# EAGLE board clock_v0.2 (EAGLE 9.5.0)
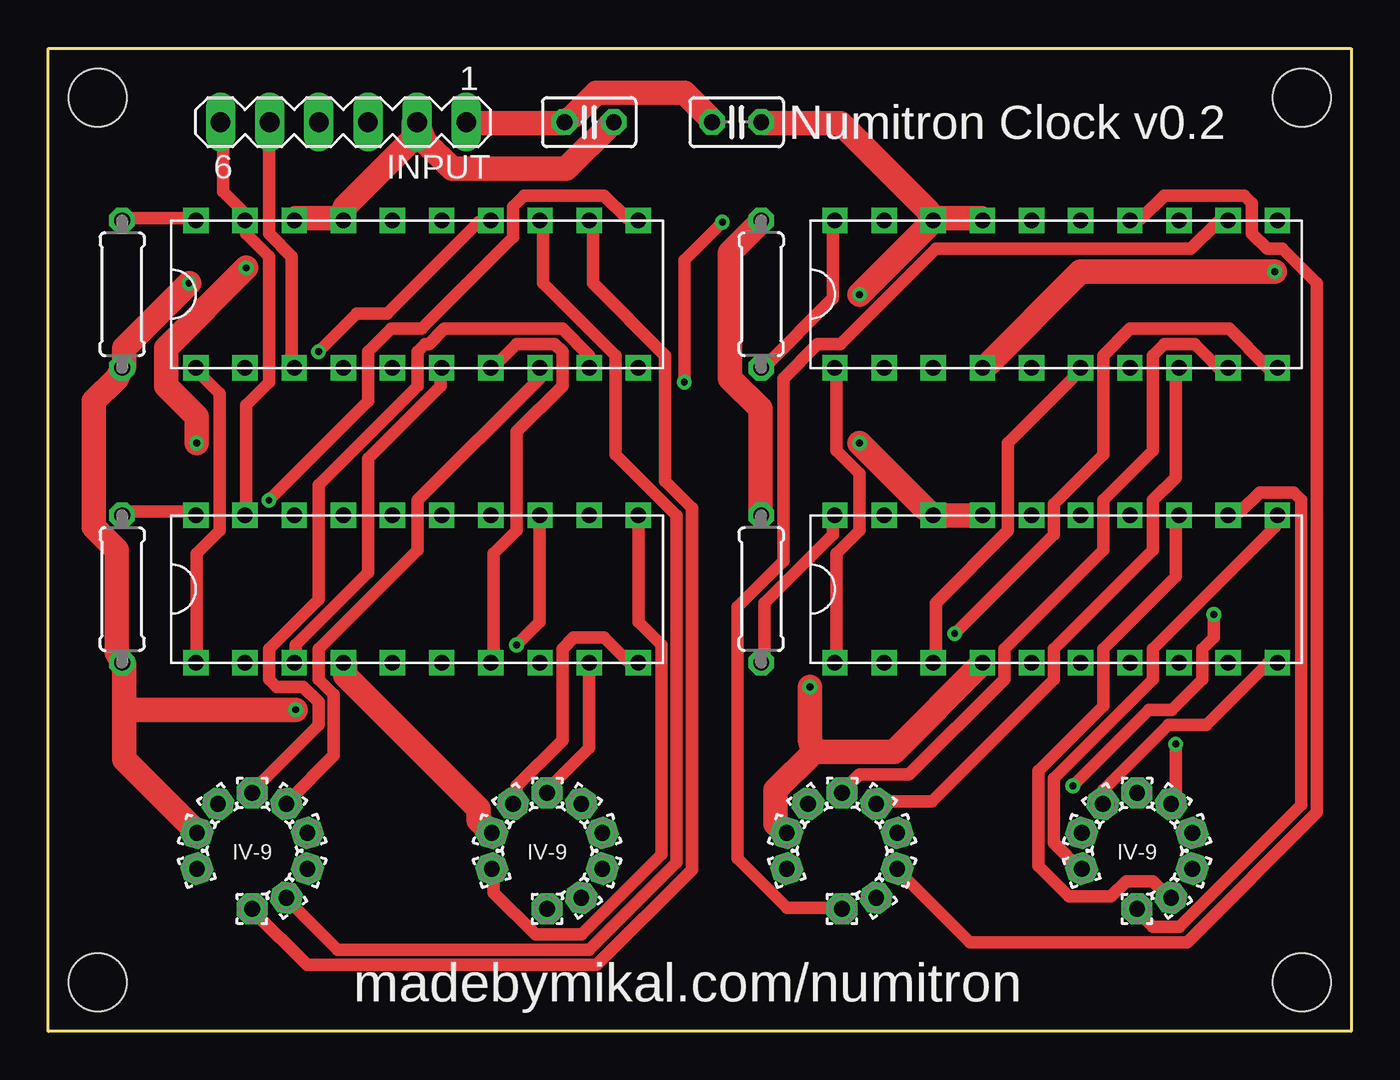
[diagram p0: board, top side]
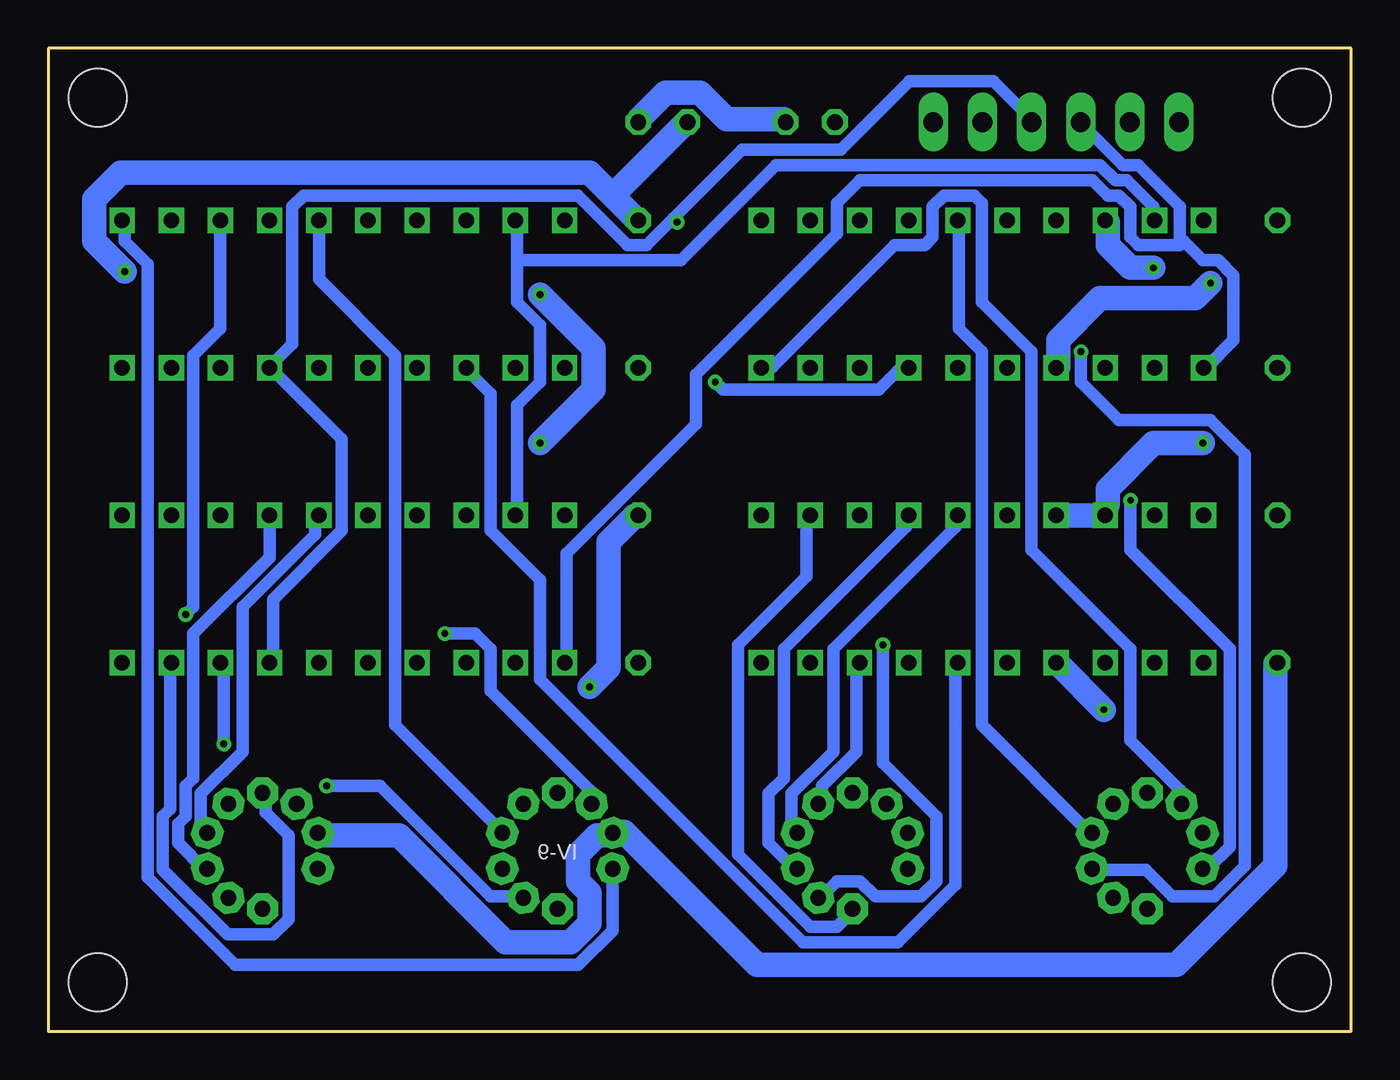
[diagram p1: board, bottom side, seen from below]

Size 67.31 x 50.8 mm. Coordinates in mm from the lower left corner, seen from the top.
Outline: 0,0 0,50.8 67.31,50.8 67.31,0 0,0
Copper layers (1*16): Top 0.035mm / dielectric 1.5mm / Bottom 0.035mm
Design rules "default": minimum track width 6mil, minimum drill 0.35mm, track to track 6mil, track to pad 6mil, pad to pad 6mil, via to via 6mil, smd to smd 6mil, copper to edge 40mil, drill to drill 6mil, minimum pad ring 10mil, minimum via ring 8mil, stop-mask expansion 4mil, vias tented up to drill 0mil, thermal gap 10mil
Net classes: 0 default: width 0.635 mm; 1 vcc: width 1.27 mm; 2 ground: width 1.27 mm
Holes 3 mm at 2.54,2.54 2.54,48.26 64.77,2.54 64.77,48.26

## Footprints (pad centres in the part's own frame; a part is rotated, then mirrored left to right if it is on the bottom)
RCL_C025-025X050 = drill 0.813 octagon: 1 -1.27,0; 2 1.27,0
1,6/0,8 = drill 0.813 pad 1.6 octagon: 1 0,0
CON-LSTB_MA06-1 = drill 1.016 long: 1 -6.35,0; 2 -3.81,0; 3 -1.27,0; 4 1.27,0; 5 3.81,0; 6 6.35,0
RCL_0207/7 = drill 0.813 octagon: 1 -3.81,0; 2 3.81,0
TPIC6B595N_PDIP-20 = drill 0.8 square: P$1 -3.81,1.27; P$2 -3.81,3.81; P$3 -3.81,6.35; P$4 -3.81,8.89; P$5 -3.81,-1.27; P$6 -3.81,-3.81; P$7 -3.81,-6.35; P$8 -3.81,-8.89; P$9 -3.81,-11.43; P$10 -3.81,11.43; P$11 3.81,1.27; P$12 3.81,3.81; P$13 3.81,6.35; P$14 3.81,8.89; P$15 3.81,11.43; P$16 3.81,-1.27; P$17 3.81,-3.81; P$18 3.81,-6.35; P$19 3.81,-8.89; P$20 3.81,-11.43

## Placement (x,y rotation side)
C1  0.1uF  [RCL_C025-025X050]  35.56,46.99 0 top
C2  47uF  [RCL_C025-025X050]  27.94,46.99 0 top
DEC1  [1,6/0,8]  12.29,6.91 306 top
DEC2  [1,6/0,8]  27.53,6.91 306 top
DEC4  [1,6/0,8]  42.77,6.91 306 top
DEC6  [1,6/0,8]  58.01,6.91 306 top
INPUT  [CON-LSTB_MA06-1]  15.24,46.99 180 top
R1  10K  [RCL_0207/7]  3.81,38.1 270 top
R3  10K  [RCL_0207/7]  3.81,22.86 270 top
R5  10K  [RCL_0207/7]  36.83,38.1 90 top
R7  10K  [RCL_0207/7]  36.83,22.86 90 top
SEGA1  [1,6/0,8]  12.29,11.76 144 top
SEGA2  [1,6/0,8]  27.53,11.76 144 top
SEGA4  [1,6/0,8]  42.77,11.76 144 top
SEGA6  [1,6/0,8]  58.01,11.76 144 top
SEGB1  [1,6/0,8]  13.38,8.41 342 top
SEGB2  [1,6/0,8]  28.62,8.41 342 top
SEGB4  [1,6/0,8]  43.86,8.41 342 top
SEGB6  [1,6/0,8]  59.1,8.41 342 top
SEGC1  [1,6/0,8]  13.38,10.26 18 top
SEGC2  [1,6/0,8]  28.62,10.26 18 top
SEGC4  [1,6/0,8]  43.86,10.26 18 top
SEGC6  [1,6/0,8]  59.1,10.26 18 top
SEGD1  [1,6/0,8]  7.67,10.26 162 top
SEGD2  [1,6/0,8]  22.91,10.26 162 top
SEGD4  [1,6/0,8]  38.15,10.26 162 top
SEGD6  [1,6/0,8]  53.39,10.26 162 top
SEGE1  [1,6/0,8]  7.67,8.41 198 top
SEGE2  [1,6/0,8]  22.91,8.41 198 top
SEGE4  [1,6/0,8]  38.15,8.41 198 top
SEGE6  [1,6/0,8]  53.39,8.41 198 top
SEGF1  [1,6/0,8]  10.53,12.33 90 top
SEGF2  [1,6/0,8]  25.77,12.33 90 top
SEGF4  [1,6/0,8]  41.01,12.33 90 top
SEGF6  [1,6/0,8]  56.25,12.33 90 top
SEGG1  [1,6/0,8]  8.76,11.76 126 top
SEGG2  [1,6/0,8]  24,11.76 126 top
SEGG4  [1,6/0,8]  39.24,11.76 126 top
SEGG6  [1,6/0,8]  54.48,11.76 126 top
U$1  [TPIC6B595N_PDIP-20]  19.05,38.1 90 top
U$3  [TPIC6B595N_PDIP-20]  19.05,22.86 90 top
U$5  [TPIC6B595N_PDIP-20]  52.07,38.1 90 top
U$7  [TPIC6B595N_PDIP-20]  52.07,22.86 90 top
VCC1  [1,6/0,8]  10.53,6.33 270 top
VCC2  [1,6/0,8]  25.77,6.33 270 top
VCC4  [1,6/0,8]  41.01,6.33 270 top
VCC6  [1,6/0,8]  56.25,6.33 270 top

## Library data of the parts
C1 C2 = v0.4; SPICEPREFIX: C
DEC1 DEC2 DEC4 DEC6 SEGA1 SEGA2 SEGA4 SEGA6 SEGB1 SEGB2 SEGB4 SEGB6 SEGC1 SEGC2 SEGC4 SEGC6 SEGD1 SEGD2 SEGD4 SEGD6 SEGE1 SEGE2 SEGE4 SEGE6 SEGF1 SEGF2 SEGF4 SEGF6 SEGG1 SEGG2 SEGG4 SEGG6 VCC1 VCC2 VCC4 VCC6 = wirepad
INPUT = v0.4; OC_FARNELL: unknown; OC_NEWARK: unknown
R1 R3 R5 R7 = v0.4; SPICEPREFIX: R
U$1 U$3 U$5 U$7 = v0.4

## Nets
G: INPUT.6 U$1.P$14 U$3.P$14 U$5.P$14 U$7.P$14
GND [ground]: C1.2 C2.2 INPUT.2 U$1.P$12 U$1.P$13 U$3.P$12 U$3.P$13 U$5.P$12 U$5.P$13 U$7.P$12 U$7.P$13
N$1: R1.1 U$1.P$15
N$2: U$1.P$19 VCC1.1
N$3: DEC1.1 U$1.P$18
N$4: SEGB1.1 U$1.P$17
N$5: SEGC1.1 U$1.P$16
N$6: SEGA1.1 U$1.P$7
N$7: SEGF1.1 U$1.P$8
N$8: SEGG1.1 U$1.P$9
N$9: SEGE1.1 U$1.P$20
N$10: U$1.P$5 U$3.P$3
N$11: U$3.P$5 U$5.P$3
N$12: U$5.P$5 U$7.P$3
N$19: R3.1 U$3.P$15
N$20: U$3.P$19 VCC2.1
N$21: DEC2.1 U$3.P$18
N$22: SEGB2.1 U$3.P$17
N$23: SEGC2.1 U$3.P$16
N$24: SEGA2.1 U$3.P$7
N$25: SEGF2.1 U$3.P$8
N$26: SEGG2.1 U$3.P$9
N$27: SEGE2.1 U$3.P$20
N$37: R5.1 U$5.P$15
N$38: U$5.P$19 VCC4.1
N$39: DEC4.1 U$5.P$18
N$40: SEGB4.1 U$5.P$17
N$41: SEGC4.1 U$5.P$16
N$42: SEGA4.1 U$5.P$7
N$43: SEGF4.1 U$5.P$8
N$44: SEGG4.1 U$5.P$9
N$45: SEGE4.1 U$5.P$20
N$55: R7.1 U$7.P$15
N$56: U$7.P$19 VCC6.1
N$57: DEC6.1 U$7.P$18
N$58: SEGB6.1 U$7.P$17
N$59: SEGC6.1 U$7.P$16
N$60: SEGA6.1 U$7.P$7
N$61: SEGF6.1 U$7.P$8
N$62: SEGG6.1 U$7.P$9
N$63: SEGE6.1 U$7.P$20
RCK: INPUT.4 U$1.P$10 U$3.P$10 U$5.P$10 U$7.P$10
SER_IN: INPUT.5 U$1.P$3
SRCK: INPUT.3 U$1.P$6 U$3.P$6 U$5.P$6 U$7.P$6
VCC [vcc]: C1.1 C2.1 INPUT.1 R1.2 R3.2 R5.2 R7.2 SEGD1.1 SEGD2.1 SEGD4.1 SEGD6.1 U$1.P$2 U$3.P$2 U$5.P$2 U$7.P$2

## Tracks (layer width: path | path; a pad name or v marks a point on that pad's centre or on a via)
G
  Top 0.635: U$3.P$14 10.22,26.86 10.22,32.37 11.4,33.55 11.4,40.05 10.22,41.23 10.22,41.82 U$1.P$14 10.22,42.22 9.04,43.4 9.04,46.94 INPUT.6
  Bottom 0.635: 43.09,39.85 43.09,41.82 U$5.P$14 | 43.09,39.85 43.09,37.69 41.91,36.51 41.91,33.55 43.09,32.37 43.09,26.86 U$7.P$14 | 43.09,39.85 34.63,39.85 29.7,44.77 12.97,44.77 12.19,43.99 11.59,43.99 10.22,42.61 10.22,42.02 U$1.P$14
GND  (via drill 0.35)
  Top 1.27: 15.14,42.02 12.78,42.02 U$1.P$13 | 15.14,42.02 U$1.P$12 | 15.14,42.02 15.34,42.61 18.88,46.15 18.88,46.94 INPUT.2 19.47,45.96 20.85,44.58 26.75,44.58 29.11,46.94 C2.2 | v7.66,30.4 7.66,31.78 6.08,33.36 6.08,35.33 v10.22,39.46 | U$7.P$12 48.21,26.66 45.85,26.66 U$7.P$13 45.26,27.06 v41.91,30.4 | U$5.P$13 45.85,42.02 48.21,42.02 U$5.P$12 | v41.91,38.08 45.45,41.62 U$5.P$13 | C1.2 36.99,46.94 40.93,46.94 45.45,42.41 U$5.P$13
  Bottom 1.27: U$3.P$12 15.14,26.66 12.78,26.66 U$3.P$13 12.58,27.25 12.58,28.04 10.22,30.4 v7.66,30.4 | v10.22,39.46 11.4,39.46 12.58,40.64 12.58,41.82 U$1.P$13 | C2.2 29.31,47.14 32.26,47.14 33.64,48.51 35.41,48.51 36.79,47.14 C1.2 | v41.91,30.4 39.15,33.16 39.15,35.33 v41.91,38.08
N$1
  Top 0.635: U$1.P$15 7.46,42.02 3.92,42.02 R1.1
N$2
  Top 0.635: U$1.P$19 28.13,41.82 28.13,38.67 31.87,34.93 31.87,28.43 33.25,27.06 33.25,8.36 28.33,3.44 13.37,3.44 10.61,6.19 VCC1.1
N$3
  Top 0.635: U$1.P$18 25.57,41.82 25.57,38.67 29.31,34.93 29.31,29.81 32.46,26.66 32.46,8.75 27.93,4.22 14.94,4.22 12.38,6.78 DEC1.1
N$4  (via drill 0.35)
  Top 0.635: v13.96,35.13 15.93,37.1 17.5,37.1 22.22,41.82 22.82,41.82 U$1.P$17
  Bottom 0.635: v13.96,35.13 13.96,33.55 11.99,31.59 7.26,31.59 5.49,29.81 5.49,8.55 7.07,6.98 9.23,6.98 10.61,8.36 13.37,8.36 SEGB1.1
N$5
  Bottom 0.635: U$1.P$16 20.26,41.82 20.26,36.31 19.07,35.13 19.07,15.84 13.56,10.32 SEGC1.1
N$6
  Top 0.635: U$1.P$7 25.38,34.14 25.38,33.75 19.07,27.45 19.07,24.89 13.96,19.77 13.96,18.2 14.75,17.41 14.75,14.26 12.38,11.9 SEGA1.1
N$7
  Top 0.635: U$1.P$8 27.93,34.34 27.93,34.93 26.56,36.31 20.45,36.31 19.67,35.52 19.47,35.52 19.07,35.13 19.07,33.36 13.96,28.24 13.96,22.33 11.4,19.77 11.4,18.2 11.79,17.8 13.17,17.8 13.96,17.02 13.96,15.84 10.61,12.49 SEGF1.1
N$8
  Bottom 0.635: U$1.P$9 30.3,34.34 29.9,34.34 23.6,40.64 22.03,40.64 21.63,41.03 21.63,42.61 21.04,43.2 19.47,43.2 19.07,42.8 19.07,37.69 16.52,35.13 16.52,24.89 11.4,19.77 11.4,15.05 8.84,12.49 8.84,11.9 SEGG1.1
N$9  (via drill 0.35)
  Top 0.635: v11.4,27.45 16.52,32.57 16.52,35.13 17.7,36.31 19.27,36.31 24,41.03 24,42.61 24.59,43.2 28.72,43.2 29.9,42.02 30.3,42.02 U$1.P$20
  Bottom 0.635: v11.4,27.45 11.4,24.89 6.28,19.77 6.28,9.54 7.26,8.55 7.66,8.55 SEGE1.1
N$10
  Top 0.635: U$3.P$3 12.78,19.18 12.78,19.97 16.52,23.71 16.52,29.62 20.26,33.36 20.26,34.14 U$1.P$5
N$11
  Bottom 0.635: U$3.P$5 20.45,18.99 20.45,7.57 23.41,4.62 28.33,4.62 41.91,18.2 41.91,23.32 44.47,25.88 44.47,32.96 45.65,34.14 U$5.P$3
N$12
  Top 0.635: U$7.P$3 45.85,19.18 45.85,22.14 49.59,25.88 49.59,30.4 53.33,34.14 U$5.P$5
N$19
  Top 0.635: U$3.P$15 7.46,26.86 3.92,26.86 R3.1
N$20
  Bottom 0.635: U$3.P$19 28.13,26.66 28.13,23.51 31.67,19.97 31.67,9.14 27.93,5.4 26.56,5.4 25.77,6.19 VCC2.1
N$21  (via drill 0.35)
  Top 0.635: v24.19,19.97 25.38,21.15 25.38,26.66 U$3.P$18
  Bottom 0.635: v24.19,19.97 24.19,13.87 21.44,11.11 21.44,7.77 22.22,6.98 24.59,6.98 25.38,7.77 26.56,7.77 27.34,6.98 DEC2.1
N$22
  Bottom 0.635: U$3.P$17 23.01,26.66 23.01,26.07 29.31,19.77 29.31,13.08 30.1,12.29 30.1,9.73 28.72,8.36 SEGB2.1
N$23
  Bottom 0.635: U$3.P$16 20.45,26.66 20.45,26.07 26.75,19.77 26.75,14.46 28.92,12.29 28.92,10.52 28.72,10.32 SEGC2.1
N$24
  Bottom 0.635: U$3.P$7 25.57,18.99 25.57,14.46 27.34,12.69 27.34,11.9 SEGA2.1
N$25
  Top 0.635: U$3.P$8 27.93,18.99 27.93,14.66 25.77,12.49 SEGF2.1
N$26
  Top 0.635: U$3.P$9 30.3,19.18 29.9,19.18 28.72,20.36 27.15,20.36 26.56,19.77 26.56,15.05 24.19,12.69 24.19,11.9 SEGG2.1
N$27
  Top 0.635: U$3.P$20 30.49,26.66 30.49,21.15 31.67,19.97 31.67,9.14 27.54,5.01 25.18,5.01 23.01,7.18 23.01,8.36 SEGE2.1
N$37
  Top 0.635: U$5.P$15 40.53,41.82 40.53,37.88 36.99,34.34 R5.1
N$38
  Top 0.635: U$5.P$19 60.81,41.82 60.41,41.82 59.04,40.44 45.85,40.44 40.93,35.52 39.74,35.52 37.97,33.75 37.97,24.3 35.61,21.94 35.61,8.95 38.17,6.39 40.93,6.39 VCC4.1
N$39  (via drill 0.35)
  Top 0.635: v60.22,21.55 60.22,20.36 59.63,19.77 59.63,18.2 58.05,16.62 56.87,16.62 v52.93,12.69
  Bottom 0.635: v60.22,21.55 59.82,21.94 59.82,34.93 58.45,36.31 58.45,41.82 U$5.P$18 | v52.93,12.69 50.18,12.69 44.47,6.98 42.89,6.98 DEC4.1
N$40
  Top 0.635: U$5.P$17 55.89,42.02 56.48,42.02 57.66,43.2 61.79,43.2 62.19,42.8 62.19,41.23 62.97,40.44 63.76,40.44 65.53,38.67 65.53,11.31 58.84,4.62 47.62,4.62 43.88,8.36 SEGB4.1
N$41
  Bottom 0.635: U$5.P$16 53.33,41.82 53.33,38.87 49.39,34.93 49.39,15.84 43.88,10.32 SEGC4.1
N$42
  Top 0.635: U$5.P$7 58.25,34.14 58.25,28.63 57.07,27.45 57.07,24.89 51.95,19.77 51.95,18.2 45.65,11.9 42.89,11.9 SEGA4.1
N$43
  Top 0.635: U$5.P$8 60.81,34.34 60.41,34.34 59.23,35.52 57.66,35.52 57.07,34.93 57.07,30.01 54.51,27.45 54.51,24.89 49.39,19.77 49.39,18.2 44.47,13.28 41.91,13.28 41.12,12.49 SEGF4.1
N$44  (via drill 0.35)
  Top 0.635: v46.83,20.56 51.95,25.68 51.95,27.25 54.51,29.81 54.51,34.93 55.89,36.31 61,36.31 62.97,34.34 63.37,34.34 U$5.P$9
  Bottom 0.635: v46.83,20.56 45.26,20.56 44.47,19.77 44.47,17.61 39.35,12.49 39.35,11.9 SEGG4.1
N$45
  Bottom 0.635: U$5.P$20 63.37,41.82 63.37,40.84 62.19,39.66 62.19,7.96 57.66,3.44 39.94,3.44 38.17,5.21 38.17,8.36 SEGE4.1
N$55
  Top 0.635: U$7.P$15 40.53,26.66 40.53,25.68 36.99,22.14 36.99,19.18 R7.1
N$56
  Top 0.635: U$7.P$19 61,26.86 61.59,26.86 62.58,27.84 64.35,27.84 64.75,27.45 64.75,11.7 58.45,5.4 57.07,5.4 56.28,6.19 VCC6.1
N$57
  Top 0.635: U$7.P$18 58.25,26.66 58.25,23.51 54.51,19.77 54.51,16.82 51.16,13.47 51.16,8.55 52.74,6.98 54.9,6.98 55.69,7.77 57.07,7.77 57.85,6.98 DEC6.1
N$58
  Bottom 0.635: U$7.P$17 55.89,24.5 59.82,20.56 59.82,13.08 60.22,12.69 60.22,11.11 60.61,10.72 60.61,9.73 59.23,8.36 SEGB6.1
N$59
  Bottom 0.635: U$7.P$16 53.52,26.66 53.52,25.68 57.26,21.94 57.26,14.46 59.43,12.29 59.43,10.52 59.23,10.32 SEGC6.1
N$60  (via drill 0.35)
  Top 0.635: v58.25,14.85 58.25,12.1 58.05,11.9 SEGA6.1
  Bottom 0.635: v58.25,14.85 58.25,18.99 U$7.P$7
N$61
  Bottom 0.635: U$7.P$8 61,18.99 61,11.51 61.4,11.11 61.4,8.36 58.05,5.01 55.69,5.01 54.9,5.8 54.9,10.13 56.08,11.31 56.08,12.29 SEGF6.1
N$62
  Top 0.635: U$7.P$9 63.37,18.99 62.97,18.99 59.82,15.84 57.85,15.84 54.51,12.49 54.51,11.9 SEGG6.1
N$63
  Top 0.635: U$7.P$20 63.37,26.66 63.37,26.07 57.07,19.77 57.07,18.2 51.95,13.08 51.95,9.73 53.33,8.36 SEGE6.1
RCK
  Top 0.635: U$7.P$10 40.73,19.18 40.73,24.7 41.91,25.88 41.91,28.83 40.73,30.01 40.73,34.14 U$5.P$10 | U$3.P$10 7.66,19.18 7.66,24.7 8.84,25.88 8.84,32.96 7.66,34.14 U$1.P$10
  Bottom 0.635: 8.64,40.84 7.66,39.85 6.87,39.85 6.08,39.07 6.08,35.72 7.46,34.34 U$1.P$10 | 8.64,40.84 8.84,41.03 8.84,42.61 11,44.77 11.79,44.77 13.96,46.94 INPUT.4 | U$7.P$10 40.53,19.18 40.53,24.7 33.84,31.39 33.84,33.95 26.56,41.23 26.56,42.8 25.38,43.99 13.37,43.99 12.58,43.2 11.99,43.2 11.4,42.61 11.4,41.03 11,40.64 8.84,40.64 8.64,40.84
SER_IN
  Top 0.635: U$1.P$3 12.58,34.34 12.58,40.05 11.4,41.23 11.4,46.94 INPUT.5
SRCK  (via drill 0.35)
  Top 0.635: U$3.P$6 23.01,19.18 23.01,24.7 24.19,25.88 24.19,30.99 26.56,33.36 26.56,35.13 26.16,35.52 24.19,35.52 23.01,34.34 U$1.P$6 | v32.86,33.55 32.86,39.85 v34.82,41.82
  Bottom 0.635: U$7.P$6 55.69,19.18 55.69,22.33 52.15,25.88 52.15,30.6 55.69,34.14 U$5.P$6 55.69,34.54 54.7,35.52 54.7,42.61 54.12,43.2 39.94,43.2 37.38,40.64 36.4,40.64 35.02,42.02 | 35.02,42.02 31.48,45.56 26.36,45.56 22.82,49.11 18.48,49.11 16.52,47.14 INPUT.3 | v32.86,33.55 32.46,33.16 24.39,33.16 23.41,34.14 23.01,34.14 U$1.P$6 | v34.82,41.82 35.02,42.02
VCC  (via drill 0.35)
  Top 1.27: U$3.P$2 15.34,18.99 15.34,18.4 22.22,11.51 22.22,10.92 22.82,10.32 SEGD2.1 | 3.92,16.62 3.92,14.06 7.66,10.32 SEGD1.1 | 3.92,16.62 3.92,18.99 R3.2 3.52,19.58 3.52,24.89 2.34,26.07 2.34,32.57 3.52,33.75 R1.2 3.92,34.34 3.92,35.33 v7.26,38.67 | 3.92,16.62 v12.78,16.62 | 39.55,14.46 43.68,14.46 48.21,18.99 U$7.P$2 | 39.55,14.46 37.58,12.49 37.58,10.72 37.97,10.32 SEGD4.1 | INPUT.1 21.63,46.94 26.56,46.94 C2.1 27.15,47.33 28.33,48.51 32.86,48.51 34.23,47.14 C1.1 | v63.37,39.26 53.33,39.26 48.41,34.34 U$5.P$2 | R7.2 36.79,26.86 36.79,32.18 35.22,33.75 35.22,40.25 36.79,41.82 R5.2 | v39.35,17.8 39.35,15.05 39.55,14.46
  Bottom 1.27: v7.26,38.67 8.05,37.88 12.97,37.88 15.14,35.72 15.14,34.34 U$1.P$2 | v12.78,16.62 15.14,18.99 U$3.P$2 | SEGD6.1 53.33,10.13 49.19,10.13 43.68,4.62 40.34,4.62 39.35,5.6 39.35,7.18 39.94,7.77 39.94,9.14 38.96,10.13 38.17,10.13 SEGD4.1 37.58,10.32 30.69,3.44 9.04,3.44 3.92,8.55 3.92,18.99 R3.2 | v63.37,39.26 64.94,40.84 64.94,43 63.56,44.38 39.35,44.38 38.17,43.2 | 38.17,43.2 36.99,42.02 R5.2 | 38.17,43.2 34.43,46.94 C1.1 | v39.35,17.8 38.37,18.79 38.37,25.29 36.99,26.66 R7.2

## Text on the board
tPlace: Numitron Clock v0.2 | IV-9 | IV-9 | IV-9 | madebymikal.com/numitron
bPlace: IV-9